# Altium PCB MSP432_MAIN.PcbDoc (part 1 of 2)
Units mil, origin at the board's own origin, x right, y up, seen from the top; angles counter-clockwise.
Board outline 3910 x 2910 mil, 2 copper layers (Top Layer, Bottom Layer); 62 components, 84 nets, 279 pads, 146 vias.
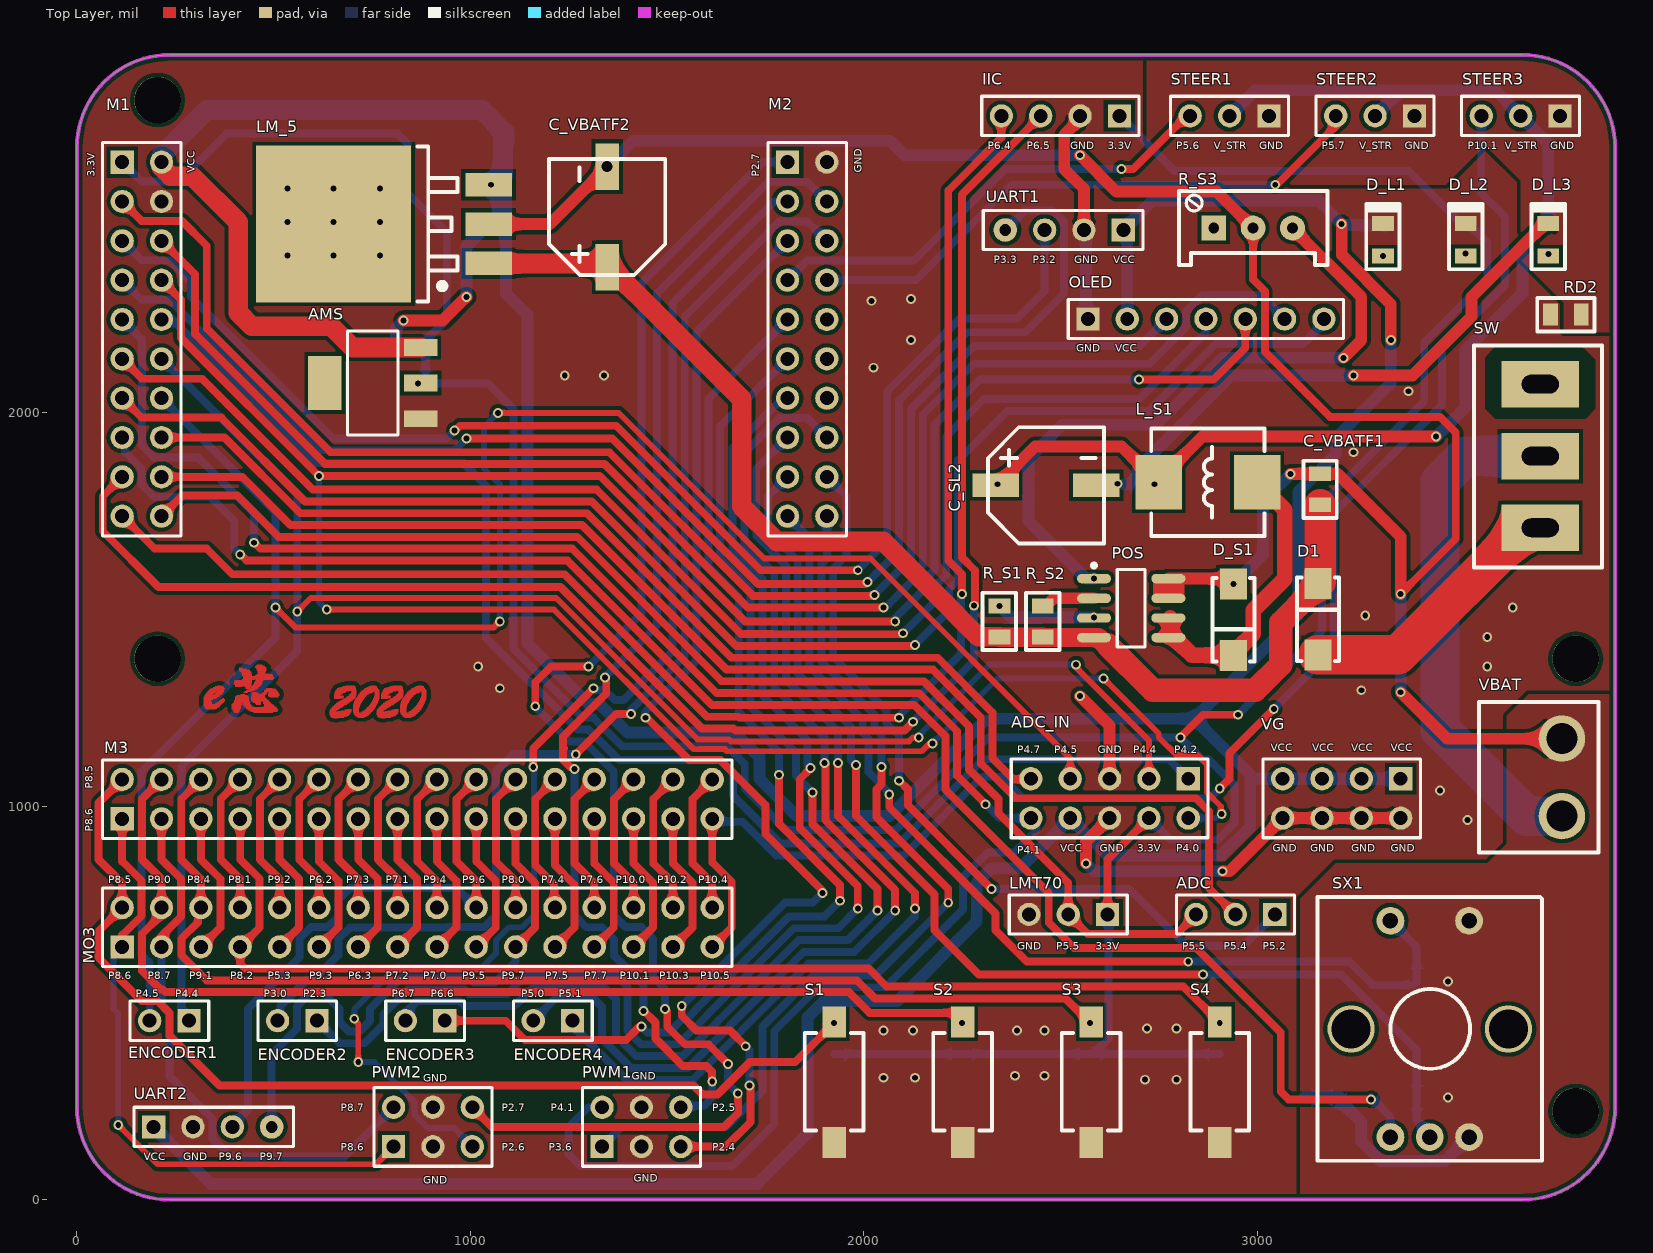
[diagram p0: Top Layer view]
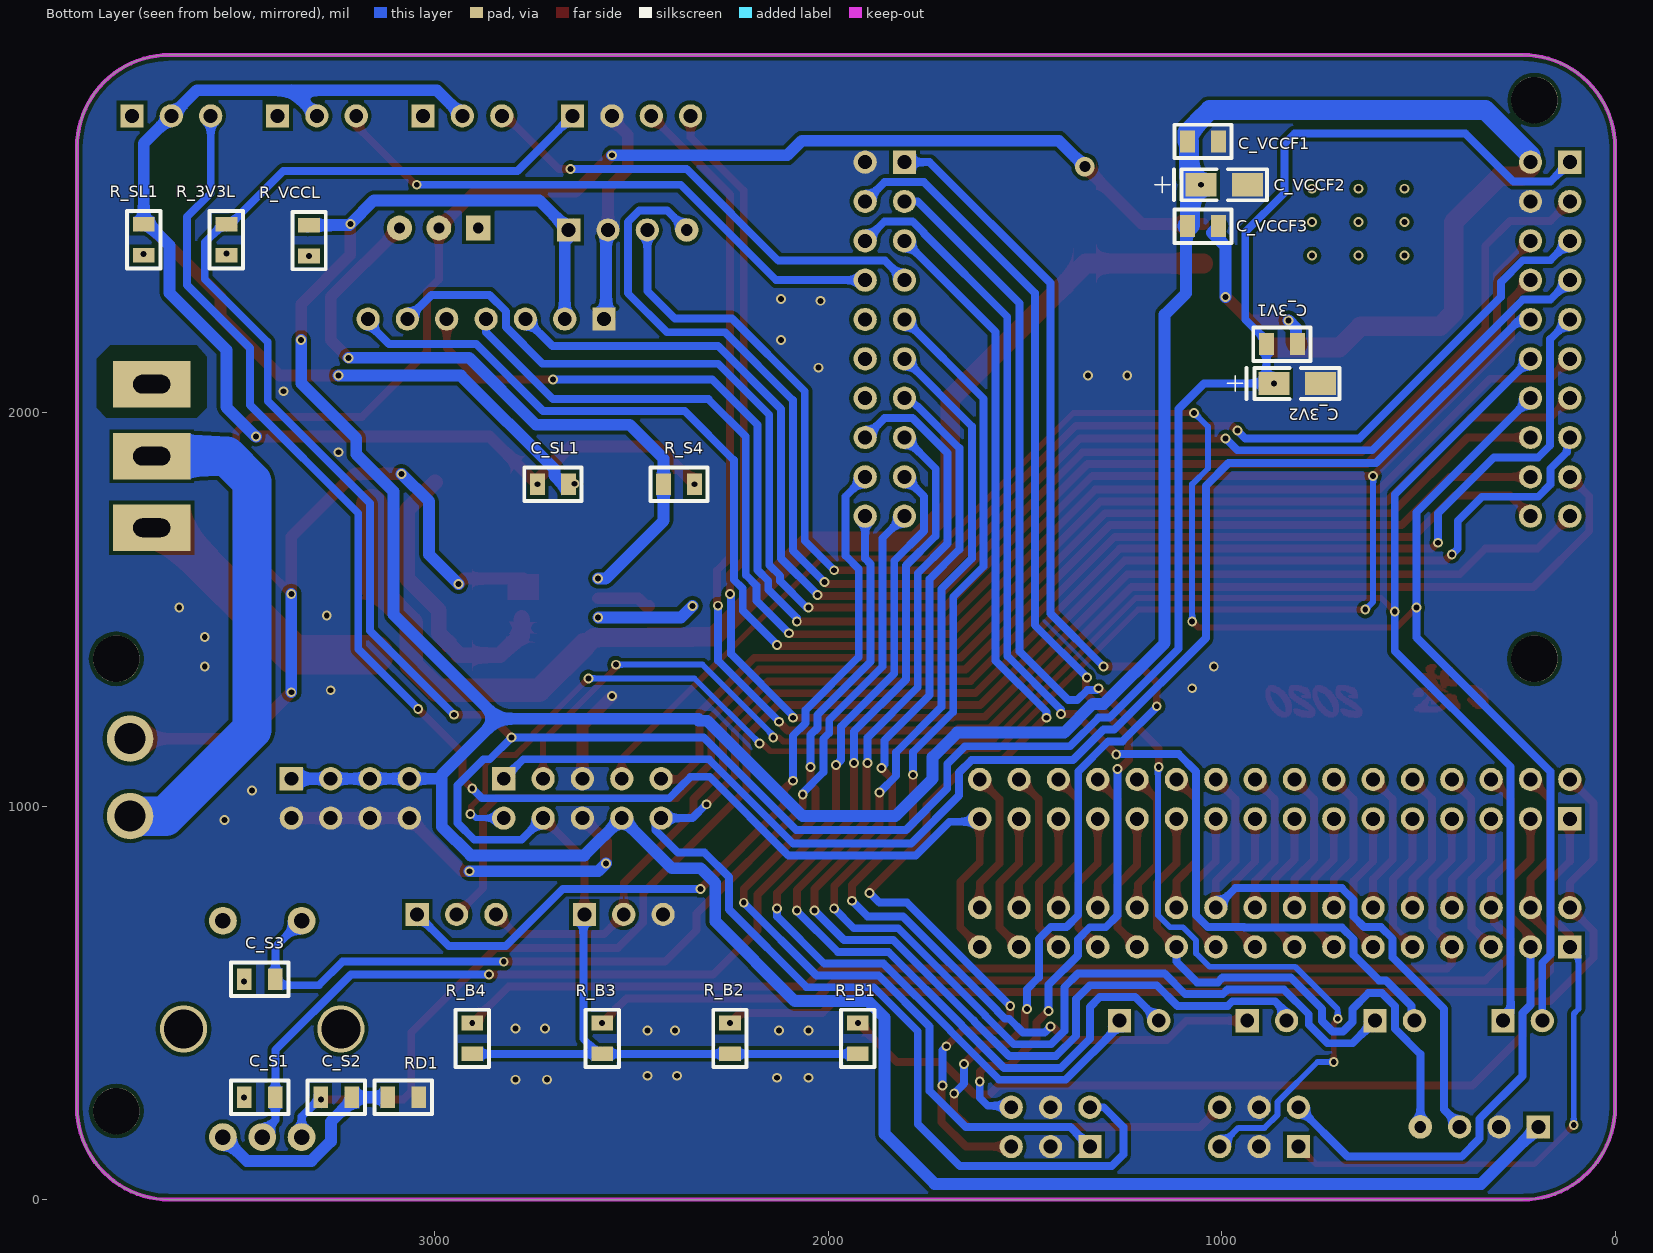
[diagram p1: Bottom Layer view, seen from below]

## Layer stack, top to bottom
Top Solder: solder mask 0.4, Solder Resist, Dk 3.5
Top Layer: signal copper 1.4
Dielectric 1: dielectric 12.6, FR-4, Dk 4.8
Bottom Layer: signal copper 1.4
Bottom Solder: solder mask 0.4, Solder Resist, Dk 3.5

## Board outline
0,235 0,2675 cw(c235,2675) 235,2910 3675,2910 cw(c3675,2675) 3910,2675 3910,235 cw(c3675,235) 3675,0 235,0 cw(c235,235)

## Design rules (kind name [scope] priority, off if disabled: settings)
Clearance [All] p1: gap=10 ignorepadtopadclearanceinfootprint=FALSE except(0: Arc-Hole Track-Hole SMDPad-Hole THPad-Hole Via-Hole Fill-Hole Poly-Hole Region-Hole Text-Hole)
Height [All] p1: minheight=0 maxheight=10000 prefheight=500
HoleSize [All] p1: absolutevalues=TRUE maxlimit=10000 minlimit=1 maxpercent=80.000 minpercent=20.000
MinimumSolderMaskSliver [All] p1: minsoldermaskwidth=0
PolygonConnect [All] p1: connectstyle=Direct reliefconductorwidth=10 reliefentries=4 polygonreliefangle="90 Angle" airgapwidth=10
RoutingVias [All] p1: holewidth=28 width=50 viastyle="Through Hole" minholewidth=0 minwidth=0 maxholewidth=100 maxwidth=100
SilkToSilkClearance [All] p1: silktosilkclearance=0
SilkToSolderMaskClearance [IsPad] p1: minsilkscreentomaskgap=0 clearancetoexposedcopper=TRUE
SolderMaskExpansion [All] p1: expansion=4
Width [All] p1: maxlimit=160 minlimit=99999 preferedwidth=10 toplayer_minwidth=0 bottomlayer_minwidth=0 minimp=50.000000 maximp=50.000000 favimp=50.000000
25 further rules are at their usual default settings.

## Components (designator, comment, footprint, x,y, rotation, side; value= is the part's Value field where it differs from the comment)
ADC "Header 3" HDR1X3 3045,725 r180 top
ADC_IN "Header 5X2" HDR2X5 2825,1070 r180 top
AMS "AMS1117" AMS_1117 757.48,2070 r0 top
C_3V1 "Cap" 0805 846.85,2175 r0 bottom value=100nF
C_3V2 "Cap Pol1" 107J/106E钽电容 808.42,2075 r180 bottom value=10uF
C_S1 "104" 0805 3445,260 r180 bottom value=10nF
C_S2 "104" 0805 3250.63,260 r0 bottom value=10nF
C_S3 "104" 0805 3445,560 r180 bottom value=10nF
C_SL1 "Cap" 0805 2700,1818.7 r0 bottom value=100nF
C_SL2 "Cap Pol1" C_AL 2465,1813.7 r90 top value=100UF
C_VBATF1 "Cap" 0805 3160,1805.63 r270 top value=100nF
C_VBATF2 "Cap Pol1" C_AL 1350,2500 r180 top value=220uF
C_VCCF1 "Cap" 0805 1047.48,2690 r0 bottom value=100nF
C_VCCF2 "Cap Pol1" 107J/106E钽电容 993.42,2580 r180 bottom value=10uF
C_VCCF3 "Cap" 0805 1047.48,2475 r0 bottom value=100nF
D1 "SS54" "DO-214  贴片二极管" 3155,1385 r90 top
D_L1 "VCC_L" LED-0805 3320,2440 r90 top
D_L2 "3V3_L" LED-0805 3530.24,2440 r90 top
D_L3 "STEER_L" LED-0805 3740.48,2440 r90 top
D_S1 "SS54" "DO-214  贴片二极管" 2940,1564.8 r270 top
ENCODER1 "AB1" HDR1X2 285,455 r180 top
ENCODER2 "AB2" HDR1X2 610,455 r180 top
ENCODER3 "AB3" HDR1X2 935,455 r180 top
ENCODER4 "AB4" HDR1X2 1260,455 r180 top
IIC "Header 4" HDR1X4#1 2650,2755 r180 top
L_S1 "Inductor" L_SERVO 2870,1813.7 r0 top value=33uH
LM_5 "LM2940_5" LM2940 652.48,2480 r180 top
LMT70 "Header 3" HDR1X3 2620,725 r180 top
M1 "M432_1" HDR2X10 115,2637.48 r270 top
M2 "M432_2" HDR2X10 1806.34,2637.48 r270 top
M3 "M432_3" HDR2X16 115,968.19 r0 top
MO3 "M432_3" HDR2X16 115,642.48 r0 top
OLED "Header 7" HDR1X7 2570,2238.7 r0 top
POS "SERVO_V" AS1015 2680,1503.7 r0 top
PWM1 "PWM_MOTOR" HDR2X3 1335,135 r0 top
PWM2 "PWM_MOTOR" HDR2X3 805,135 r0 top
R_3V3L "2K" 0805 3530,2440 r90 bottom
R_B1 "4.7K" 0805 1925,410 r90 bottom
R_B2 "4.7K" 0805 2250,410 r90 bottom
R_B3 "4.7K" 0805 2575,410 r90 bottom
R_B4 "4.7K" 0805 2905,410 r90 bottom
R_S1 "2.7K" 0805 2345,1470 r90 top
R_S2 "1K" 0805 2455,1470 r90 top
R_S3 "1K" R_VAR 2990,2470 r90 top
R_S4 "1K" 0805 2379.37,1818.7 r0 bottom
R_SL1 "10K" 0805 3740,2440 r90 bottom
R_VCCL "4.7K" 0805 3320,2438.03 r90 bottom
RD1 "0R" 0805 3080.63,260 r180 bottom
RD2 "0R" 0805 3785,2250 r180 top
S1 "微动开关" KEY-SMD1 1925,452.09 r270 top
S2 "微动开关" KEY-SMD1 2251.67,452.09 r270 top
S3 "微动开关" KEY-SMD1 2578.33,452.09 r270 top
S4 "微动开关" KEY-SMD1 2905,452.09 r270 top
STEER1 "Header 3" HDR1X3 3030,2755 r180 top
STEER2 "Header 3" HDR1X3 3400,2755 r180 top
STEER3 "Header 3" HDR1X3 3770,2755 r180 top
SW "SW" 纽子开关 3720,1889 r0 top
SX1 "Header 5" 璇码器 3430.94,440 r270 top
UART1 "Header 4" HDR1X4#2 2660,2465 r180 top
UART2 "Header 4" HDR1X4#2 195,185 r0 top
VBAT "AB4" "Con 2接线端子" 3775,1073.43 r90 top
VG "Header 4X2" HDR2X4 3365,1070 r180 top

## Footprints (in the part's own frame and the unit in brackets; to place one, negate y for a bottom-side part, rotate by r counter-clockwise, add the part's x,y. Pads: shape width x height; smd on the part's side, far side on the other; paste and mask are expansions set on the pad)
107J/106E钽电容 [mm]
  rect 2x1.5 smd: 1(-1.5,0) 2(1.5,0)
  silkscreen extent -4.5,-1 2.75,1, body extent -2,-0.75 2,0.75, height 1.6
0805 [mm] "SMD, 0805"
  rect 0.95x1.4 smd: 1(-1,0) 2(1,0)
  silkscreen extent -1.85,-1.08 1.85,1.08, body extent -1,-0.62 1,0.63, height 0.45
AMS_1117 [mil]
  rect 85x43 smd: 1(116.5,-84.85) 2(116.5,6.15) 3(116.5,96.15)
  rect 85x138 smd: 4(-127.5,6.15)
  silkscreen extent -69,-126 59,138
AS1015 [mm]
  oval 2.2x0.6 smd: 1(-2.4,1.905) 2(-2.4,0.635) 3(-2.4,-0.635) 4(-2.4,-1.905) 5(2.4,-1.905) 6(2.4,-0.635) 7(2.4,0.635) 8(2.4,1.905)
  silkscreen extent -2.52,-2.5 0.9,2.88, body extent -1.95,-2.45 1.95,2.45, height 1.75
C_AL [mm]
  rect 1.5x3 smd: 1(0.056,3.299) 2(0.056,-3.201)
  silkscreen extent -3.69,-3.7 3.81,3.8
"Con 2接线端子" [mm]
  round 3 hole 2: 1(-2.5,0) 2(2.5,0)
  silkscreen extent -4.85,-2.36 4.88,5.36, body extent -5,-2.5 5,5.5, height 1.5
"DO-214  贴片二极管" [mm]
  rect 2x1.75 smd: 1(0,0) 2(4.6,0)
  silkscreen extent -0.4,-1.35 5,1.35, body extent -0.2,-1.34 4.91,1.33, height 2.12
HDR1X2 [mm] "Connector; Header; 2 Position"
  rect 1.5x1.5 hole 0.9: 1(0,0)
  round 1.5 hole 0.9: 2(2.54,0)
  silkscreen extent -1.27,-1.27 3.81,1.27
HDR1X3 [mm] "Connector; Header; 3 Position"
  rect 1.5x1.5 hole 0.9: 1(0,0)
  round 1.5 hole 0.9: 2(2.54,0) 3(5.08,0)
  silkscreen extent -1.27,-1.27 6.35,1.27
HDR1X4#1 [mm] "Connector; Header; 4 Position"
  rect 1.5x1.5 hole 0.9: 1(0,0)
  round 1.5 hole 0.9: 2(2.54,0) 3(5.08,0) 4(7.62,0)
  silkscreen extent -1.27,-1.27 8.89,1.27
HDR1X4#2 [mm] "Connector; Header; 4 Position"
  rect 1.5x1.5 hole 0.9: 1(0,0)
  round 1.5 hole 0.9: 2(2.54,0) 3(5.08,0)
  round 1.524 hole 0.762: 4(7.62,0)
  silkscreen extent -1.27,-1.27 9.04,1.27, body extent -1.22,-2.49 8.94,2.51, height 2.5
HDR1X7 [mm] "Connector; Header; 7 Position"
  rect 1.5x1.5 hole 0.9: 1(0,0)
  round 1.5 hole 0.9: 2(2.54,0) 3(5.08,0) 4(7.62,0) 5(10.16,0) 6(12.7,0) 7(15.24,0)
  silkscreen extent -1.27,-1.27 16.51,1.27, body extent -1.27,-1.27 16.51,1.27, height 8.54
HDR2X3 [mm] "Connector; Header; 3x2 Position"
  rect 1.5x1.5 hole 0.9: 1(0,0)
  round 1.5 hole 0.9: 2(0,2.54) 3(2.54,0) 4(2.54,2.54) 5(5.08,0) 6(5.08,2.54)
  silkscreen extent -1.27,-1.27 6.35,3.81, body extent -1.27,-1.27 6.38,3.81, height 8.54
HDR2X4 [mm] "Connector; Header; 4x2 Position"
  rect 1.5x1.5 hole 0.9: 1(0,0)
  round 1.5 hole 0.9: 2(0,2.54) 3(2.54,0) 4(2.54,2.54) 5(5.08,0) 6(5.08,2.54) 7(7.62,0) 8(7.62,2.54)
  silkscreen extent -1.27,-1.27 8.89,3.81
HDR2X5 [mm] "Connector; Header; 5x2 Position"
  rect 1.5x1.5 hole 0.9: 1(0,0)
  round 1.5 hole 0.9: 2(0,2.54) 3(2.54,0) 4(2.54,2.54) 5(5.08,0) 6(5.08,2.54) 7(7.62,0) 8(7.62,2.54) 9(10.16,0) 10(10.16,2.54)
  silkscreen extent -1.27,-1.27 11.43,3.81
HDR2X10 [mm] "Connector; Header; 10x2 Position"
  rect 1.5x1.5 hole 0.9: 1(0,0)
  round 1.5 hole 0.9: 2(0,2.54) 3(2.54,0) 4(2.54,2.54) 5(5.08,0) 6(5.08,2.54) 7(7.62,0) 8(7.62,2.54) 9(10.16,0) 10(10.16,2.54) 11(12.7,0) 12(12.7,2.54) 13(15.24,0) 14(15.24,2.54) 15(17.78,0) 16(17.78,2.54) 17(20.32,0) 18(20.32,2.54) 19(22.86,0) 20(22.86,2.54)
  silkscreen extent -1.27,-1.27 24.13,3.81
HDR2X16 [mm] "Connector; Header; 16x2 Position"
  rect 1.5x1.5 hole 0.9: 1(0,0)
  round 1.5 hole 0.9: 2(0,2.54) 3(2.54,0) 4(2.54,2.54) 5(5.08,0) 6(5.08,2.54) 7(7.62,0) 8(7.62,2.54) 9(10.16,0) 10(10.16,2.54) 11(12.7,0) 12(12.7,2.54) 13(15.24,0) 14(15.24,2.54) 15(17.78,0) 16(17.78,2.54) 17(20.32,0) 18(20.32,2.54) 19(22.86,0) 20(22.86,2.54) 21(25.4,0) 22(25.4,2.54) 23(27.94,0) 24(27.94,2.54) 25(30.48,0) 26(30.48,2.54) 27(33.02,0) 28(33.02,2.54) 29(35.56,0) 30(35.56,2.54) 31(38.1,0) 32(38.1,2.54)
  silkscreen extent -1.27,-1.27 39.37,3.81
KEY-SMD1 [mm]
  rect 2x1.5 smd: 1(0,0) 2(7.8,0)
  silkscreen extent 0.73,-1.9 7.03,1.9, body extent -0.06,-1.94 7.83,1.91, height 2.5
L_SERVO [mil]
  rect 118.11x137.8 smd: 1(130,10) 2(-120,10)
  silkscreen extent -139,-127 149,147, body extent -132,-120 142,140, height 120
LED-0805 [mm] "LED, SMD, 0805"
  rect 0.95x1.4 smd: 1(-1.05,0) 2(1.05,0)
  silkscreen extent -1.9,-1.08 2.3,1.08, body extent -1.03,-0.46 1.03,0.45, height 0.85
LM2940 [mil]
  rect 118.5x59.5 smd: 1(-394,100) 2(-394,0) 3(-394,-100)
  rect 394.5x398.5 smd: 4(0,0)
  silkscreen extent -315,-197 -213,197
R_VAR [mm]
  rect 1.6x1.6 hole 0.7: 1(0,2.54)
  round 1.6 hole 0.7: 2(0,0) 3(0,-2.54)
  silkscreen extent -2.4,-4.8 2.4,4.8, body extent -2.4,-4.75 2.4,4.75, height 11.52
璇码器 [mil] "Capacitor, Electrolytic, Radial; Body 5 x 6.8 mm (Dia.xH typ); Pin Spacing 2 mm (typ)"
  round 70.87 hole 39.37: 1(281,108) 2(281,8) 3(281,-92) 4(-269,108) 5(-269,-92)
  round 120 hole 98.43: 6(6,208) 7(6,-192)
  silkscreen extent -329,-277 341,293, body extent -283,-237 299,254, height 866
纽子开关 [mm]
  rect 5x3 hole 1.2 slot 2.4 at 0 deg: 1(0,-4.597) 2(0,0.025) 3(0,4.674)
  silkscreen extent -4.29,-7.16 3.99,7.16, body extent -4.14,-6.52 3.86,6.68, height 33.36

## Part data
ADC LMT70 STEER1 STEER2 STEER3: "Header, 3-Pin", LatestRevisionDate=17-Jul-2002, LatestRevisionNote="Re-released for DXP Platform.", Publisher="Altium Limited"
ADC_IN: "Header, 5-Pin, Dual row", LatestRevisionDate=17-Jul-2002, LatestRevisionNote="Re-released for DXP Platform.", Publisher="Altium Limited"
C_3V1 C_SL1 C_VBATF1 C_VCCF1 C_VCCF3: "Capacitor", LatestRevisionDate=17-Jul-2002, LatestRevisionNote="Re-released for DXP Platform.", PackageDescription="Radial Cap, Thru-Hole; 2 Leads; 0.3 in Pin Spacing", PackageReference=RAD-0.3, Published=8-Jun-2000, Publisher="Altium Limited"
C_3V2 C_SL2 C_VBATF2 C_VCCF2: "Polarized Capacitor (Radial)", LatestRevisionDate=17-Jul-2002, LatestRevisionNote="Re-released for DXP Platform.", PackageDescription="Polarized Capacitor (Radial); 2 Leads", PackageReference=RB7.6-15, Published=8-Jun-2000, Publisher="Altium Limited"
C_S1 C_S2 C_S3: library part C_1, "Capacitor", LatestRevisionDate=17-Jul-2002, LatestRevisionNote="Re-released for DXP Platform.", PackageDescription="Radial Cap, Thru-Hole; 2 Leads; 0.3 in Pin Spacing", PackageReference=RAD-0.3, Published=8-Jun-2000, Publisher="Altium Limited"
D1 D_S1: library part Diode, "Default Diode", Code_JEDEC=DO-214-AB, LatestRevisionDate=17-Jul-2002, LatestRevisionNote="Re-released for DXP Platform.", PackageDescription="DO-214-AB/SMC; 2 C-Bend Leads; Body 7.9 x 5.9 mm, inc. leads (LxW)", PackageReference=SMC, PackageVersion=Sep-1996, Published=8-Jun-2000, Publisher="Altium Limited"
D_L1 D_L2 D_L3: library part LED0, "Typical INFRARED GaAs LED", LatestRevisionDate=08-Jul-2005, LatestRevisionNote="Mech Layer 1 removed.", PackageDescription="LED; 2 Leads", PackageReference=LED-0, Published=8-Jun-2000, Publisher="Altium Limited"
ENCODER1 ENCODER2 ENCODER3 ENCODER4 VBAT: library part "Header 2", "Header, 2-Pin", LatestRevisionDate=17-Jul-2002, LatestRevisionNote="Re-released for DXP Platform.", Publisher="Altium Limited"
IIC UART1 UART2: "Header, 4-Pin", LatestRevisionDate=17-Jul-2002, LatestRevisionNote="Re-released for DXP Platform.", Publisher="Altium Limited"
R_3V3L R_S1 R_S2 R_S4 R_SL1 R_VCCL: library part R, "贴片电阻", =贴?, ѧ?=www.ooocke.com
R_B1 R_B2 R_B3 R_B4: library part Res2, "Resistor", LatestRevisionDate=17-Jul-2002, LatestRevisionNote="Re-released for DXP Platform.", PackageDescription="Axial Device, Thru-Hole; 2 Leads; 0.4 in Pin Spacing", PackageReference=AXIAL-0.4, Published=8-Jun-2000, Publisher="Altium Limited"
R_S3: library part RESVR, "Potentiometer"
RD1 RD2: library part R_3, "贴片电阻", =贴?, ѧ=www.ooocke.com
SW: library part 双刀单柄开关
VG: "Header, 4-Pin, Dual row", LatestRevisionDate=17-Jul-2002, LatestRevisionNote="Re-released for DXP Platform.", Publisher="Altium Limited"
L_S1: Code_IEC=1005, Code_JEITA=0402, LatestRevisionDate=29-May-2009, LatestRevisionNote="IPC-7351 Footprint Added.", PackageDescription="Chip Inductor", PackageReference=0402-A, Published=8-Jun-2000, Publisher="Altium Limited"

## Free pads (board coordinates)
  round 118.11 hole 118.11 unplated paste+0: 7(205,2795) 8(3810,225) 9(205,1375) 10(3810,1375)

## Via types
v1: diameter 25, hole 15, Top Layer to Bottom Layer, 145 vias
v2: diameter 50, hole 28, Top Layer to Bottom Layer, 1 vias

## Nets (pads, with @x,y where several pads share a name; then routed paths per layer and width w, separated by ;. In a path a pad name is that pad's centre, name@x,y a point inside that pad or via, vN(x,y) a via of type N, cw(c..) or ccw(c..) an arc to the next point about the centre after c; other vN are vias at no path point)
3.3V: ADC_IN.4 AMS.2 C_3V1.2 C_3V2.1 IIC.1 LMT70.1 M1.1 R_3V3L.2 R_B1.1 R_B2.1 R_B3.1 R_B4.1 | length 9269.9
  Top Layer w20: LMT70.1@2620,725 2620,865 ADC_IN.4@2725,970 ; v1(2805,1175) 2862.64,1232.64 v1(2951.48,1232.64)
  Bottom Layer w20: M1.1@115,2637.48 164.53,2587.95 257.95,2587.95 380,2710 815,2710 840,2685 840,2560 940,2460 940,2237.64 886.22,2183.86 C_3V1.2@886.22,2175 886.22,2093.74 v1(867.48,2075) 1045,2075 1110,2010 1110,1400.39 1285.06,1225.33 1312.76,1225.33 1385.58,1152.5 1652.5,1152.5 1697.5,1107.5 1697.5,1045 1802.5,940 2081.61,940 2316.61,1175 v1(2805,1175) 2860.47,1119.53 2876.43,1119.53 2942.5,1053.46 2942.5,957.5 2900,915 2780,915 ADC_IN.4@2725,970 ; R_B1.1@1925,370.63 R_B2.1@2250,370.63 R_B3.1@2575,370.63 R_B3.1@2583.86,370.63 ; LMT70.1@2620,725 2622.56,722.44 2622.56,409.33 R_B3.1@2583.86,370.63 ; IIC.1@2650,2755 2790,2615 3385.51,2615 3521.14,2479.37 R_3V3L.2@3530,2479.37 3538.86,2479.37 3585,2433.23 3585,2340 3425,2180 3425,2030.5 3165,1770.5 3165,1446.16 v1(2951.48,1232.64) ; R_B4.1@2905,370.63 R_B3.1@2583.86,370.63
GND: ADC_IN.5 ADC_IN.6 AMS.1 C_3V1.1 C_3V2.2 C_VCCF1.1 C_VCCF2.2 C_VCCF3.1 D_L1.2 D_L2.2 IIC.2 LMT70.3 M1.4 M2.2 OLED.1 PWM1.3 PWM1.4 PWM2.3 PWM2.4 RD1.2 RD2.2 S1.2 S2.2 S3.2 S4.2 UART1.2 UART2.2 VG.2 VG.4 VG.6 VG.8 | length 2258.5
  Top Layer w30: v1(830,2235) 930,2235 v1(990,2295) ; v1(2550,1280) 2625,1205 ADC_IN.5@2625,1070 ; IIC.2@2550,2755 2550,2747.14 2510,2707.14 2510,2620 2560,2570 UART1.2@2560,2465 ; v1(2565,855) 2565,910 ADC_IN.6@2625,970 ; v1(2912.5,835) 2930,835 VG.8@3065,970 VG.6@3165,970 VG.4@3265,970 VG.2@3365,970
  Bottom Layer w30: C_3V1.1@807.48,2175 811.18,2178.7 811.18,2216.18 v1(830,2235) ; v1(990,2295) 990,2423.11 1025,2458.11 C_VCCF3.1@1008.11,2475 ; UART1.2@2560,2465 2565,2460 2565,2243.7 OLED.1@2570,2238.7 ; v1(2565,855) 2585,835 v1(2912.5,835)
  other v1: 2715,305 2795,305 2050,310 2130,310 2385,315 2460,315 2050,430 2125,430 2390,430 2460,430 2720,435 2795,435 3535,965 3465,1040 3265,1295 1075,1300 1020,1355 3585,1355 3585,1430 3275,1485 3650,1505 3245,1900 3385,2055 1240,2095 1340,2095 2025,2115 2120,2185 2020,2285 2120,2290
NetD_L1_1: D_L1.1 R_VCCL.1
  other v1: 3320,2398.66
NetD_L2_1: D_L2.1 R_3V3L.1
  other v1: 3530.24,2405.63
NetD_L3_1: D_L3.1 R_SL1.1
  other v1: 3740.68,2403.66
NetD_S1_2: D_S1.2 L_S1.1 POS.5 POS.6 | length 752
  Top Layer w40: POS.6@2779.49,1478.7 2779.49,1428.7 2789.61,1428.7 2834.61,1383.7 D_S1.2@2940,1383.7 2940,1388.62 2990,1438.62 2990,1498.56 3070,1578.56 3070,1753.7 L_S1.1@3000,1823.7
NetPOS_1: POS.1 R_S3.3 R_S4.2 | length 1713.9
  Top Layer w30: R_S3.3@3090,2470 3265,2295 3265,2185 v1(3220,2140)
  Bottom Layer w30: v1(2585.51,1578.7) 2566.3,1578.7 2418.74,1726.26 R_S4.2@2418.74,1818.7 2418.74,1883.74 2505,1970 2743.03,1970 2913.03,2140 v1(3220,2140)
NetPOS_2: POS.2 R_S2.2 | length 138.5
  Top Layer w30: R_S2.2@2455,1509.37 2463.86,1509.37 2483.19,1528.7 POS.2@2585.51,1528.7
NetPOS_3: POS.3 R_S1.2 | length 252.2
  Bottom Layer w30: v1(2345,1509.37) 2374.37,1480 v1(2585,1480)
P1.5: M1.13 OLED.7 | length 3877.3
  Top Layer w20: M1.13@115,2037.48 164.53,1987.95 367.05,1987.95 580,1775 1308.81,1775 1676.1,1407.72 1755.64,1407.72 1755.85,1407.5 2127.5,1407.5 v1(2130,1410)
  Bottom Layer w20: v1(2130,1410) 2217.5,1497.5 2217.5,1553.46 2240,1575.96 2240,1880 2365,2005 2725,2005 2895,2175 3116.87,2175 3170,2228.13 OLED.7@3170,2238.7
P1.6: M2.12
P1.7: M2.14
P2.3: ENCODER2.1 M2.13 | length 3297.7
  Top Layer w20: v1(1865,1097.5) 1865,1096.15 1837.5,1068.65 1837.5,944.93 1985,797.43 v1(1985,740)
  Bottom Layer w20: ENCODER2.1@610,455 667.5,397.5 730.89,397.5 778.71,445.32 778.71,471.29 841.95,534.53 985.24,534.53 997.27,522.5 1092.5,522.5 1145,575 1365,575 1400,540 1400,429.04 1434.04,395 1528.39,395 1600,466.61 1600,467.61 1822.39,690 1935,690 v1(1985,740) ; M2.13@1806.34,2037.48 1795.77,2037.48 1775.3,2017.01 1773.4,2017.01 1666.81,1910.42 1666.81,1653.19 1742.5,1577.5 1742.5,1282.5 1857.5,1167.5 1857.5,1106.35 1865,1098.85 v1(1865,1097.5)
P2.4: M2.5 PWM1.5 | length 3139.7
  Top Layer w20: v1(1445,1225) 1448.69,1225 1556.19,1117.5 1594.27,1117.5 1594.49,1117.72 1635.51,1117.72 1750,1003.23 1750,930 1895,785 v1(1895,780) ; PWM1.5@1535,135 1650,135 1712.5,197.5 1712.5,287.5 v1(1710,290) ; v1(1537.5,492.5) 1537.5,467.5 1575,430 1660,430 v1(1700,390)
  Bottom Layer w20: v1(1445,1225) 1445,1240 1575,1370 1575,2206.14 M2.5@1806.34,2437.48 ; v1(1537.5,492.5) 1800,755 1870,755 v1(1895,780) ; v1(1700,390) 1710,380 v1(1710,290)
P2.5: M2.4 PWM1.6 | length 3024.7
  Top Layer w20: 1235.62,1150 1235.62,1176.74 1345.42,1286.54 1345.42,1324.73 v1(1342.33,1327.83) ; 1237.96,1147.67 1235.62,1145.34 1235.62,1118.41 1254.66,1099.38 1259.27,1099.38 1263.65,1095 v1(1265,1095) ; v1(1440,480) 1440.96,480 1470.48,450.48 1470.48,409.52 1540,340 1600,340 1614.04,325.96 1614.04,300.96 v1(1615,300)
  Bottom Layer w20: v1(1265,1095) 1265,722.44 1294.96,692.48 1335.04,692.48 1365.47,662.05 1365.47,620.79 1440,546.26 v1(1440,480) ; v1(1342.33,1327.83) 1475,1460.5 1475,2305 1757.01,2587.01 1856.81,2587.01 M2.4@1906.34,2537.48 ; PWM1.6@1535,235 1538.63,238.63 1594.53,238.63 1615,259.1 v1(1615,300)
P2.6: M2.3 PWM2.5 | length 3302.3
  Top Layer w15: v1(705,460) 705,457.29 715,447.29 v1(715,350)
  Top Layer w20: v1(1160,1100) 1160,1147.08 v1(1312.92,1300)
  Bottom Layer w15: v1(705,460) 705,483.89 813.14,592.03 1031.05,592.03 1064.77,625.75 1064.77,658.76 1098.49,692.48 1131.51,692.48 1162.03,723 1162.03,1087.67 1161.91,1087.78 1161.91,1098.09 v1(1160,1100) ; v1(715,350) 756.51,350 857.76,248.74 857.76,215.73 891.05,182.45 957.55,182.45 PWM2.5@1005,135
  Bottom Layer w20: v1(1312.92,1300) 1317.59,1295.33 1341.75,1295.33 1367.08,1270 1390,1270 1513.79,1393.79 1513.79,2278.79 1772.48,2537.48 M2.3@1806.34,2537.48
P2.7: M2.1 PWM2.6 | length 3779.2
  Top Layer w20: PWM2.6@1005,235 1055,185 1645,185 1680,220 v1(1680,270) ; v1(1165,1254.43) 1165,1315 1205,1355 v1(1300,1355) ; v1(1495,485) 1495,483.65 1500.48,478.17 1500.48,439.52 1545,395 1605,395 v1(1655,345)
  Bottom Layer w20: v1(1165,1254.43) 1165,1252.57 1252.57,1165 1288.23,1165 1364.53,1088.7 1364.53,722.91 1394.49,692.95 1434.57,692.95 1464.79,662.74 1464.79,565.21 1495,535 v1(1495,485) ; v1(1300,1355) 1435,1490 1435,2330 1742.48,2637.48 M2.1@1806.34,2637.48 ; v1(1655,345) 1655,295 v1(1680,270)
P3.0: ENCODER2.2 M2.6 | length 3026.5
  Top Layer w20: v1(1268.12,1131.88) 1371.25,1235 v1(1408.31,1235)
  Bottom Layer w20: ENCODER2.2@510,455 517.47,462.47 517.47,492.24 582.34,557.1 599.66,557.1 664.53,621.97 664.53,662.05 694.48,692.01 942.01,692.01 942.95,692.95 1035.51,692.95 1065.47,722.91 1065.47,1088.7 1109.27,1132.5 1267.5,1132.5 v1(1268.12,1131.88) ; v1(1408.31,1235) 1408.31,1245.73 1545,1382.43 1545,2244.28 1756.81,2456.09 1756.81,2458 1785.82,2487.01 1856.81,2487.01 M2.6@1906.34,2437.48
P3.2: M1.5 UART1.3 | length 3412.5
  Top Layer w20: v1(960,1955) 961.35,1955 973.85,1967.5 1370.87,1967.5 1738.37,1600 v1(1985,1600)
  Bottom Layer w20: M1.5@115,2437.48 164.53,2387.95 234.57,2387.95 290,2332.52 290,2295 650,1935 940,1935 v1(960,1955) ; v1(1985,1600) 2060,1675 2060,2055 2245,2240 2390,2240 2460,2310 UART1.3@2460,2465
P3.3: M1.7 UART1.4 | length 3632.7
  Top Layer w20: v1(990,1935) 1360.94,1935 1730.94,1565 2005,1565 v1(2010,1570)
  Bottom Layer w20: M1.7@115,2337.48 164.53,2287.95 234.57,2287.95 617.52,1905 960,1905 v1(990,1935) ; v1(2010,1570) 2090,1650 2090,2032.43 2262.57,2205 2410,2205 2509.53,2304.53 2509.53,2485.51 2480.51,2514.53 2409.53,2514.53 UART1.4@2360,2465
P3.5: C_S1.2 M2.17 SX1.2 | length 2935.3
  Top Layer w20: v1(1980,1105) 1980,975.96 2180,775.96 2180,685 2292.5,572.5 v1(2862.5,572.5)
  Bottom Layer w20: M2.17@1806.34,1837.48 1756.81,1787.95 1756.81,1700 1832.5,1624.31 1832.5,1337.5 1967.5,1202.5 1967.5,1117.5 v1(1980,1105) ; v1(2862.5,572.5) 3213.57,572.5 3405.63,380.44 C_S1.2@3405.63,260 3405.63,202.44 3438.94,169.13 SX1.2@3438.94,159
P3.6: M2.20 PWM1.1 | length 2365
  Top Layer w20: v1(2045,1100) 2045,1055.96 2032.5,1043.46 2032.5,972.5 2215,790 v1(2215,755)
  Bottom Layer w20: PWM1.1@1335,135 1384.53,184.53 1650.49,184.53 1742.5,276.54 1742.5,440.41 1872.09,570 2030,570 v1(2215,755) ; M2.20@1906.34,1737.48 1906.34,1629.73 1892.5,1615.89 1892.5,1367.5 2027.5,1232.5 2027.5,1199.11 2045,1181.61 v1(2045,1100)
P3.7: C_S3.2 M2.19 SX1.5 | length 2586.6
  Top Layer w20: v1(2065,1030) 2065,997.43 2335,727.43 2335,685 2415,605 v1(2825,605)
  Bottom Layer w20: M2.19@1806.34,1737.48 1862.5,1681.32 1862.5,1355.07 1997.5,1220.07 1997.5,1186.69 2012.5,1171.69 2012.5,1086.54 2065,1034.04 v1(2065,1030) ; v1(2825,605) 3235,605 3295,545 3396.93,545 3405.63,553.7 C_S3.2@3405.63,560 3405.63,642.31 SX1.5@3338.94,709
P4.0: ADC_IN.2 M1.8 OLED.5 | length 6906.5
  Top Layer w15: v1(635,1500) 1212.58,1500 1567.58,1145 1582.88,1145 1583.09,1145.22 1646.91,1145.22 1652.12,1140 2147.43,1140 2167.43,1160 v1(2175,1160) ; v1(2610,1325) 2750,1185 2750,1175 2794.11,1130.89 2847.92,1130.89 2872.03,1106.78 2872.03,1035.55 2908.09,999.49 2908.09,981.91 v1(2910,980)
  Top Layer w20: M1.8@215,2337.48 264.53,2287.95 264.53,2190.47 v1(615,1840) 1328.67,1840 1698.67,1470 v1(2080,1470) ; v1(2700,2085) 2890,2085 2970,2165 OLED.5@2970,2238.7
  Bottom Layer w15: v1(615,1840) 615,1520 v1(635,1500) ; v1(2175,1160) 2340,1325 v1(2610,1325) ; ADC_IN.2@2825,970 2895,970 2905,980 v1(2910,980)
  Bottom Layer w20: v1(2080,1470) 2080,1478.79 2152.5,1551.29 2152.5,1573.31 2180,1600.81 2180,1970 2295,2085 v1(2700,2085)
P4.1: ADC_IN.10 M1.9 PWM1.2 | length 5057.9
  Top Layer w20: v1(450,1670) 451.35,1670 466.35,1655 1259.11,1655 1626.39,1287.72 1705.93,1287.72 1706.15,1287.5 2140.89,1287.5 2237.5,1190.89 2237.5,1077.5 v1(2310,1005)
  Bottom Layer w20: M1.9@115,2237.48 165,2187.48 165,1917.44 195.43,1887.01 307.99,1887.01 450,1745 v1(450,1670) ; PWM1.2@1335,235 1300,235 1250,185 1250,115 1279.53,85.47 1665.47,85.47 1772.5,192.5 1772.5,427.98 1884.52,540 2055,540 2252.5,737.5 2252.5,820.03 2314.97,882.5 2382.5,882.5 2440,940 2440,955 ADC_IN.10@2425,970 2345,970 v1(2310,1005)
P4.2: ADC_IN.1 M1.10 | length 3531.9
  Bottom Layer w20: M1.10@215,2237.48 242.52,2237.48 607.5,1872.5 982.5,1872.5 1040,1815 1040,1427.96 1272.96,1195 1300,1195 ; 1300.33,1195.33 1377.94,1117.72 1635.51,1117.72 1667.5,1085.73 1667.5,1027.5 1790,905 2089.04,905 2303.57,1119.53 2775.47,1119.53 ADC_IN.1@2825,1070
P4.3: M1.11 OLED.4 | length 3625
  Top Layer w20: M1.11@115,2137.48 165.47,2087.01 317.99,2087.01 600,1805 1321.24,1805 1688.52,1437.72 1768.06,1437.72 1768.28,1437.5 2097.5,1437.5 v1(2100,1440)
  Bottom Layer w20: v1(2100,1440) 2182.5,1522.5 2182.5,1560.89 2210,1588.39 2210,1940 2305,2035 2700,2035 2870,2205 OLED.4@2870,2238.7
P4.4: ADC_IN.3 ENCODER1.1 M1.12 | length 4551.5
  Top Layer w15: v1(560,1495) 595,1530 1217.94,1530 1577.72,1170.22 1657.26,1170.22 1662.48,1165 2114.85,1165 2124.85,1175 v1(2140,1175) ; v1(2540,1360) 2540,1352.57 2725,1167.57 ADC_IN.3@2725,1070
  Bottom Layer w15: v1(2140,1175) 2140,1180 2320,1360 v1(2540,1360)
  Bottom Layer w20: M1.12@215,2137.48 560,1792.48 v1(560,1495) 560,1395 265.47,1100.47 265.47,474.53 ENCODER1.1@285,455
P4.5: ADC_IN.7 ENCODER1.2 M1.14 | length 4881
  Top Layer w15: v1(505,1505) 555,1455 1060,1455 v1(1075,1470) ; v1(1070,2000) 1377.26,2000 1747.26,1630 2017.36,1630 2525,1122.36 ADC_IN.7@2525,1070
  Bottom Layer w15: v1(1070,2000) 1035,1965 1035,1858.89 1075,1818.89 v1(1075,1470)
  Bottom Layer w20: ENCODER1.2@185,455 185,602.44 164.53,622.91 164.53,1088.7 505,1429.18 v1(505,1505) 505,1747.48 M1.14@215,2037.48
P4.6: C_S2.2 M1.15 SX1.3 | length 4286.7
  Top Layer w20: v1(415,1640) 416.35,1640 431.35,1625 1246.68,1625 1613.96,1257.72 1693.5,1257.72 1693.72,1257.5 2128.46,1257.5 2207.5,1178.46 2207.5,1042.5 2470.47,779.53 2470.47,704.48 2534.96,640 2845,640 3060,425 3060,275 3080,255 v1(3290,255)
  Bottom Layer w20: M1.15@115,1937.48 122.47,1930.01 122.47,1900.05 164.53,1858 164.53,1817.91 195.43,1787.01 337.99,1787.01 400,1725 400,1655 v1(415,1640) ; C_S2.2@3290,260 3338.94,211.06 SX1.3@3338.94,159
P4.7: ADC_IN.9 M1.16 | length 2638.5
  Top Layer w20: M1.16@215,1937.48 375.09,1937.48 567.57,1745 1296.39,1745 1663.67,1377.72 1743.21,1377.72 1743.43,1377.5 2188.17,1377.5 2327.5,1238.17 2327.5,1122.5 2381.72,1068.28 2423.28,1068.28 ADC_IN.9@2425,1070
P5.0: ENCODER4.2 M2.16 | length 2822.2
  Top Layer w20: v1(1900,1110) 1902.5,1107.5 1902.5,964.78 2080,787.28 v1(2080,735)
  Bottom Layer w20: ENCODER4.2@1160,455 1220,515 1310,515 1335,490 1335,409.19 1409.19,335 1553.24,335 1660,441.76 1660,442.76 1847.24,630 1975.96,630 2080,734.04 v1(2080,735) ; v1(1900,1110) 1900,1175 1772.5,1302.5 1772.5,1592.5 1696.81,1668.19 1696.81,1898 1785.82,1987.01 1856.81,1987.01 M2.16@1906.34,1937.48
P5.1: ENCODER4.1 M2.15 | length 2529.8
  Top Layer w20: v1(1935,1110) 1935,975 2130,780 v1(2130,740)
  Bottom Layer w20: ENCODER4.1@1260,455 1260,441.76 1396.76,305 1565.67,305 1690,429.33 1690,430.34 1859.66,600 2010,600 2130,720 v1(2130,740) ; M2.15@1806.34,1937.48 1726.81,1857.95 1726.81,1687.57 1802.5,1611.88 1802.5,1322.5 1935,1190 v1(1935,1110)
P5.2: ADC.1 M2.18 | length 2061.7
  Top Layer w20: v1(2090,1065) 2112.5,1042.5 2112.5,1002.5 v1(2325,790)
  Bottom Layer w20: M2.18@1906.34,1837.48 1955.87,1787.95 1955.87,1636.83 1922.5,1603.46 1922.5,1379.93 2057.5,1244.93 2057.5,1211.54 2090,1179.04 v1(2090,1065) ; v1(2325,790) 2675,790 2820,645 2965,645 ADC.1@3045,725
P5.3: M3.9 MO3.9 | length 366.7
  Top Layer w20: MO3.9@515,642.48 564.53,692.01 564.53,815.47 515,865 M3.9@515,968.19
P5.4: ADC.2 M1.18 | length 3373.3
  Top Layer w20: M1.18@215,1837.48 420.09,1837.48 542.57,1715 1283.96,1715 1651.24,1347.72 1730.78,1347.72 1731,1347.5 2175.74,1347.5 2297.5,1225.74 2297.5,1109.26 2386.29,1020.47 2844.57,1020.47 2877.5,987.54 2877.5,792.5 ADC.2@2945,725
P5.5: ADC.3 LMT70.2 M1.20 | length 3266.2
  Top Layer w20: M1.20@215,1737.48 267.52,1790 407.57,1790 512.57,1685 1271.53,1685 1638.82,1317.72 1718.36,1317.72 1718.57,1317.5 2153.31,1317.5 2267.5,1203.31 2267.5,1093.46 2342.5,1018.46 2342.5,982.46 2520,804.96 LMT70.2@2520,725 2569.53,675.47 2795.47,675.47 ADC.3@2845,725
P5.6: M2.7 STEER1.3 | length 1196.6
  Top Layer w20: v1(2655,2620) 2685,2620 2820,2755 STEER1.3@2830,2755
  Bottom Layer w20: M2.7@1806.34,2337.48 1855.87,2387.01 2127.01,2387.01 2360,2620 v1(2655,2620)
P5.7: M2.8 STEER2.3 | length 1481.2
  Top Layer w20: v1(3046.25,2580) 3050,2580 3200,2730 STEER2.3@3200,2755
  Bottom Layer w20: M2.8@1906.34,2337.48 2132.48,2337.48 2375,2580 v1(3046.25,2580)
P6.0: M1.3 OLED.3 | length 3707.3
  Top Layer w20: M1.3@115,2537.48 164.53,2487.95 267.05,2487.95 330,2425 330,2215 645,1900 1353.52,1900 1718.52,1535 2017.43,1535 2019.93,1537.5 v1(2027.5,1537.5)
  Bottom Layer w20: v1(2027.5,1537.5) 2120,1630 2120,2010 2280,2170 2701.3,2170 OLED.3@2770,2238.7
P6.1: M1.6 OLED.6 | length 3939.6
  Top Layer w20: M1.6@215,2437.48 300,2352.48 300,2200.96 630.96,1870 1341.09,1870 1706.09,1505 v1(2050,1505)
  Bottom Layer w20: v1(2050,1505) 2055,1505 2122.5,1572.5 2122.5,1585.74 2150,1613.24 2150,1995 2280,2125 2726.34,2125 2819.53,2218.19 2819.53,2258.27 2861.26,2300 3008.7,2300 OLED.6@3070,2238.7
P6.2: M3.12 MO3.12 | length 367.1
  Top Layer w20: MO3.12@615,742.48 615,815 565,865 565,1018.19 M3.12@615,1068.19
P6.3: M3.13 MO3.13 | length 366.7
  Top Layer w20: MO3.13@715,642.48 764.53,692.01 764.53,815.47 715,865 M3.13@715,968.19
P6.4: IIC.4 M1.19 | length 3854
  Top Layer w20: M1.19@115,1737.48 197.48,1655 330,1655 395,1590 1239.25,1590 1601.54,1227.72 1681.08,1227.72 1683.8,1225 v1(2090,1225) ; v1(2250,1540) 2250,1590 2215,1625 2215,2565 2350,2700 IIC.4@2350,2755
  Bottom Layer w20: v1(2090,1225) 2090,1230 2247.5,1387.5 2247.5,1537.5 v1(2250,1540)
P6.5: IIC.3 M1.17 | length 4139.4
  Top Layer w20: M1.17@115,1837.48 65.47,1787.95 65.47,1699.53 207.5,1557.5 1229.33,1557.5 1589.11,1197.72 1668.65,1197.72 1673.87,1192.5 2103.46,1192.5 2125,1214.04 v1(2125,1215) ; v1(2280,1510) 2282.5,1512.5 2282.5,1599.93 2250,1632.43 2250,2555 IIC.3@2450,2755
  Bottom Layer w20: v1(2125,1215) 2280,1370 v1(2280,1510)
P6.6: ENCODER3.1 M2.9 | length 2885
  Top Layer w20: ENCODER3.1@935,455 1089.96,455 1139.49,405.47 1395.47,405.47 1430,440 v1(1435,440) ; v1(1785,1080) 1785,955 1940,800 v1(1940,760)
  Bottom Layer w20: v1(1435,440) 1450,425 1505.29,425 1540.29,460 1550.96,460 1570,479.04 1570,480.04 1809.96,720 1900,720 v1(1940,760) ; v1(1785,1080) 1785,1137.57 1682.5,1240.07 1682.5,1532.5 1605,1610 1605,2036.14 M2.9@1806.34,2237.48
P6.7: ENCODER3.2 M2.11 | length 3181.4
  Top Layer w20: v1(1870,1035) 1870,954.85 2035,789.85 v1(2035,735)
  Bottom Layer w20: ENCODER3.2@835,455 835,475 864.53,504.53 972.81,504.53 984.53,492.81 984.53,492.5 1112.5,492.5 1165,545 1335,545 1370,510 1370,416.61 1421.61,365 1540.81,365 1630,454.19 1630,455.19 1834.81,660 1960,660 v1(2035,735) ; M2.11@1806.34,2137.48 1635,1966.14 1635,1630 1712.5,1552.5 1712.5,1252.5 1827.5,1137.5 1827.5,1077.5 v1(1870,1035)
P7.0: M3.17 MO3.17 | length 366.7
  Top Layer w20: MO3.17@915,642.48 964.53,692.01 964.53,810.47 915,860 M3.17@915,968.19
P7.1: M3.16 MO3.16 | length 367.1
  Top Layer w20: MO3.16@815,742.48 815,815 765,865 765,1018.19 M3.16@815,1068.19
P7.2: M3.15 MO3.15 | length 366.7
  Top Layer w20: MO3.15@815,642.48 864.53,692.01 864.53,815.47 815,865 M3.15@815,968.19
P7.3: M3.14 MO3.14 | length 367.1
  Top Layer w20: MO3.14@715,742.48 715,815 665,865 665,1018.19 M3.14@715,1068.19
P7.4: M3.24 MO3.24 | length 367.1
  Top Layer w20: MO3.24@1215,742.48 1212.99,744.49 1212.99,802.01 1165,850 1165,1018.19 M3.24@1215,1068.19
P7.5: M3.23 MO3.23 | length 366.7
  Top Layer w20: MO3.23@1215,642.48 1264.53,692.01 1264.53,800.47 1215,850 M3.23@1215,968.19
P7.6: M3.26 MO3.26 | length 367.1
  Top Layer w20: MO3.26@1315,742.48 1315,805 1265,855 1265,1018.19 M3.26@1315,1068.19
P7.7: M3.25 MO3.25 | length 366.7
  Top Layer w20: MO3.25@1315,642.48 1364.53,692.01 1364.53,805.47 1315,855 M3.25@1315,968.19
P8.0: M3.22 MO3.22 | length 367.1
  Top Layer w20: MO3.22@1115,742.48 1115,810 1065,860 1065,1018.19 M3.22@1115,1068.19
P8.1: M3.8 MO3.8 | length 366.7
  Top Layer w20: MO3.8@415,742.48 415,815 365.47,864.53 365.47,1018.66 M3.8@415,1068.19
P8.2: M3.7 MO3.7 R_B4.2 S4.1 | length 2961.6
  Top Layer w20: M3.7@415,968.19 415,865 464.53,815.47 464.53,692.01 MO3.7@415,642.48 415,600 427.5,587.5 2012.5,587.5 2058.54,541.46 2812.91,541.46 v1(2905,449.37)
P8.4: M3.6 MO3.6 R_B3.2 S3.1 | length 2889.2
  Top Layer w20: M3.6@315,1068.19 265,1018.19 265,865 315,815 MO3.6@315,742.48 307.53,735.01 307.53,705.05 265.47,663 265.47,621.97 329.94,557.5 1982.5,557.5 2028.54,511.46 2512.91,511.46 v1(2575,449.37)
P8.5: M3.2 MO3.2 R_B1.2 S1.1 | length 2650.6
  Top Layer w20: M3.2@115,1068.19 55,1008.19 55,865 115,805 MO3.2@115,742.48 55,682.48 55,615.14 165.61,504.53 205.52,504.53 235.47,474.57 235.47,417.19 362.66,290 1567.57,290 1590.07,267.5 1628.46,267.5 1710.96,350 1825.63,350 v1(1925,449.37)
P8.6: M3.1 MO3.1 PWM2.1 | length 1593.4
  Top Layer w15: v1(105,190) 205,90 760,90 PWM2.1@805,135
  Top Layer w20: MO3.1@115,642.48 115,672.44 164.53,721.97 164.53,810.55 115,860.08 M3.1@115,968.19
  Bottom Layer w15: v1(105,190) 105,472.71 92.97,484.73 92.97,620.45 MO3.1@115,642.48